# EAGLE board Single Board 12s baru (EAGLE 9.6.2)
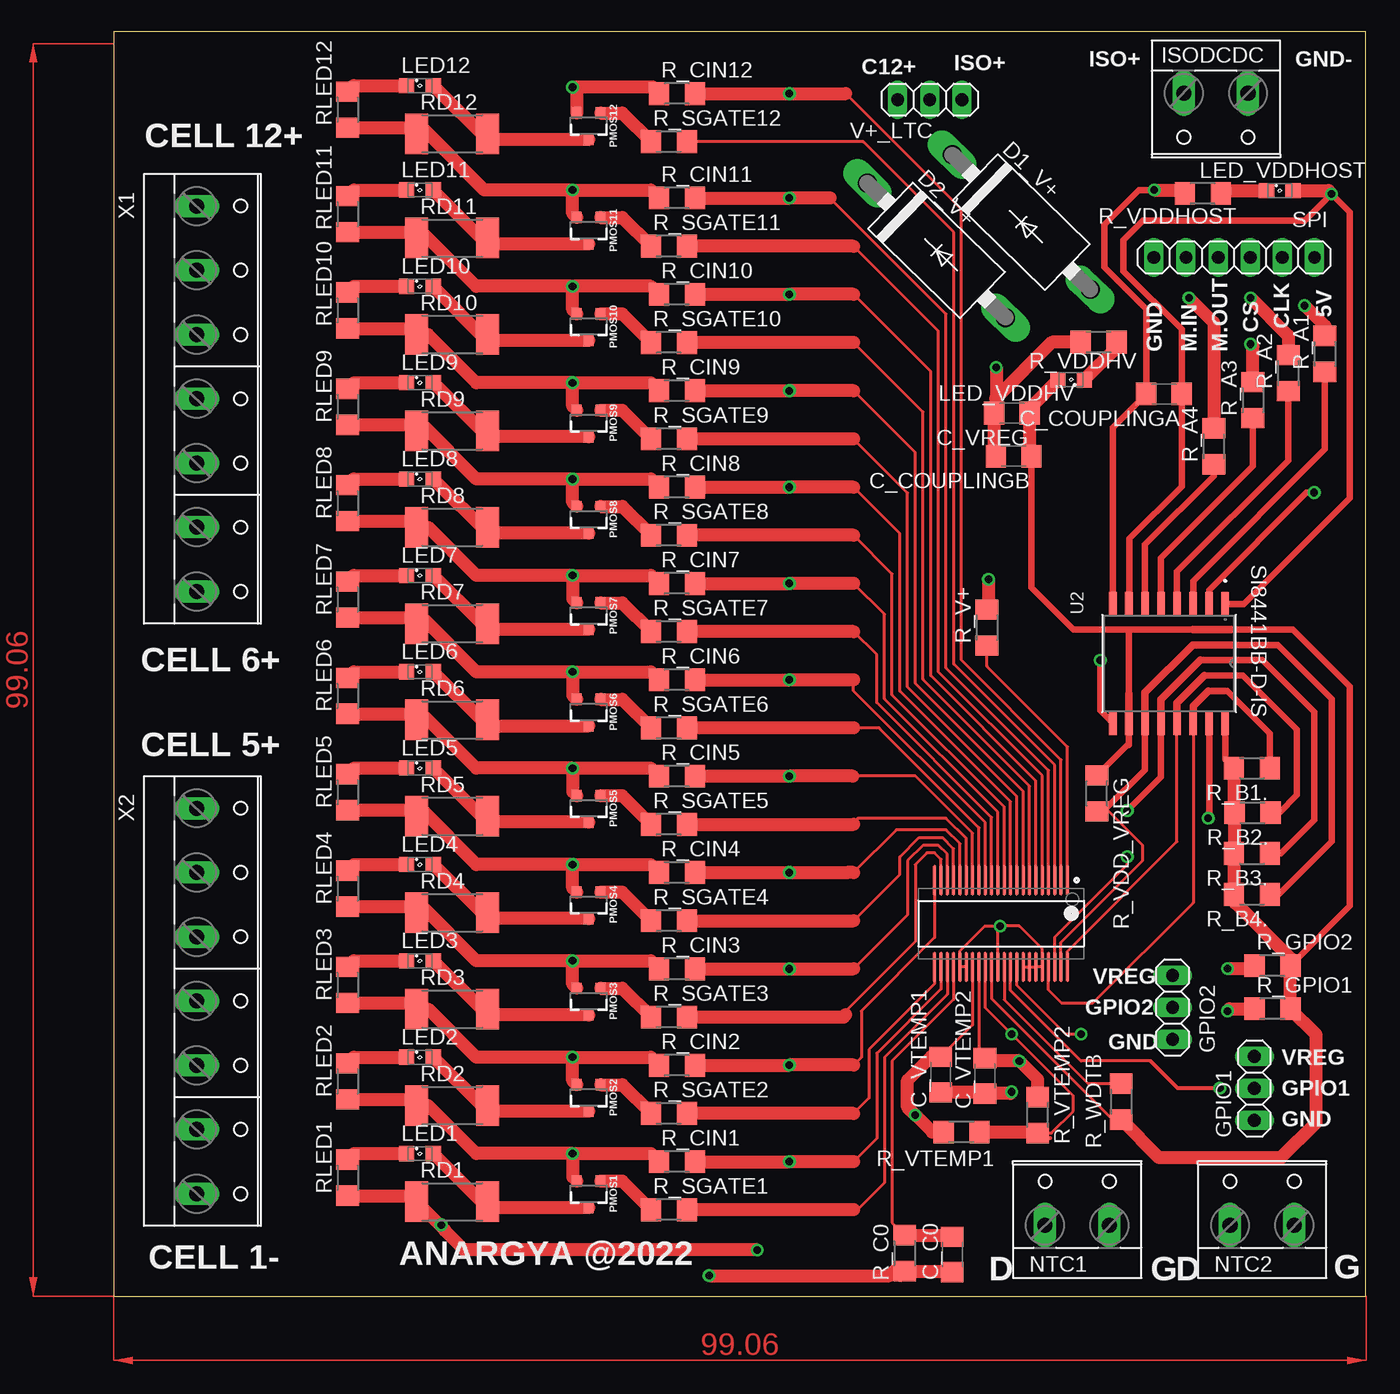
[diagram p0: board, top side]
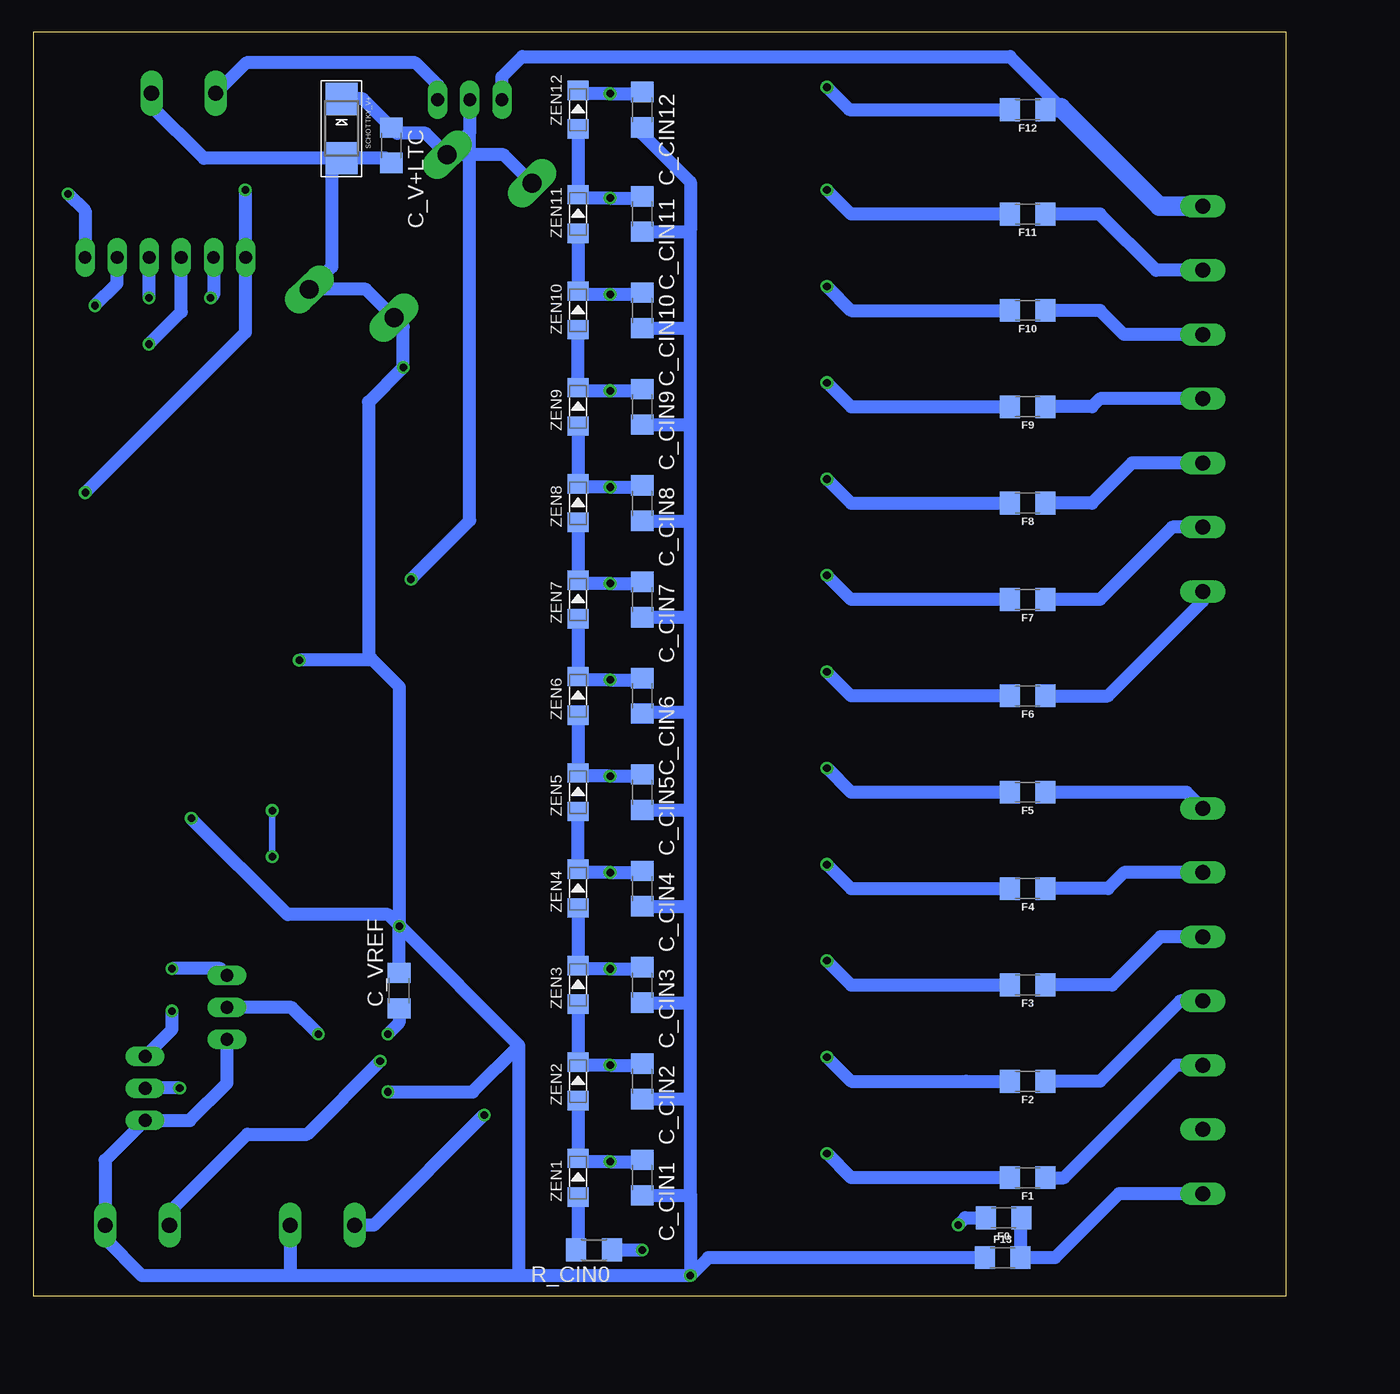
[diagram p1: board, bottom side, seen from below]

Size 99.04 x 100 mm. Coordinates in mm from the lower left corner, seen from the top.
Outline: 0,0 99.04,0 99.04,100 0,100 0,0
Copper layers (1*16): Top 0.035mm / dielectric 1.5mm / Bottom 0.035mm
Design rules "default *": minimum track width 6mil, minimum drill 0.6mm, track to track 6mil, track to pad 6mil, pad to pad 6mil, via to via 6mil, smd to smd 6mil, copper to edge 40mil, drill to drill 6mil, minimum pad ring 10mil, minimum via ring 8mil, stop-mask expansion 4mil, vias tented up to drill 0mil, thermal gap 10mil

## Footprints (pad centres in the part's own frame; a part is rotated, then mirrored left to right if it is on the bottom)
C1206 = smd 1.6 x 1.8: 1 -1.4,0; 2 1.4,0
DO27-15 = drill 1.499 long: A 7.62,0; C -7.62,0
1206 = smd 1.6 x 1.8: 1 -1.4,0; 2 1.4,0
1X03 = drill 1.016 long: 1 -2.54,0; 2 0,0; 3 2.54,0
W237-132 = drill 1.194 long: 1 -2.54,-0.635; 2 2.54,-0.635
SML0805 = smd 1.2 x 1.2: A 1.05,0; C -1.05,0
SOT23-3 = smd 0.8 x 0.9: 1 -0.95,-1; 2 0.95,-1; 3 0,1.1
R1206 = smd 1.6 x 1.803: 1 -1.422,0; 2 1.422,0
R2512 = smd 1.8 x 3.2: 1 -2.8,0; 2 2.8,0
SMADIODE = smd 2.54 x 2.54: A 2.349,0; C -2.349,0
1X06 = drill 1.016 long: 1 -6.35,0; 2 -3.81,0; 3 -1.27,0; 4 1.27,0; 5 3.81,0; 6 6.35,0
SOIC-16W_SIL = smd 1.9 x 0.6: 1 -4.7,4.445; 2 -4.7,3.175; 3 -4.7,1.905; 4 -4.7,0.635; 5 -4.7,-0.635; 6 -4.7,-1.905; 7 -4.7,-3.175; 8 -4.7,-4.445; 9 4.7,-4.445; 10 4.7,-3.175; 11 4.7,-1.905; 12 4.7,-0.635; 13 4.7,0.635; 14 4.7,1.905; 15 4.7,3.175; 16 4.7,4.445
LINEAR_TECHNOLOGY_LTC6803HG-4#PBF_2 = smd 2.45 x 0.25: 1 -3.425,5.25; 2 -3.425,4.75; 3 -3.425,4.25; 4 -3.425,3.75; 5 -3.425,3.25; 6 -3.425,2.75; 7 -3.425,2.25; 8 -3.425,1.75; 9 -3.425,1.25; 10 -3.425,0.75; 11 -3.425,0.25; 12 -3.425,-0.25; 13 -3.425,-0.75; 14 -3.425,-1.25; 15 -3.425,-1.75; 16 -3.425,-2.25; 17 -3.425,-2.75; 18 -3.425,-3.25; 19 -3.425,-3.75; 20 -3.425,-4.25; 21 -3.425,-4.75; 22 -3.425,-5.25; 23 3.425,-5.25; 24 3.425,-4.75; 25 3.425,-4.25; 26 3.425,-3.75; 27 3.425,-3.25; 28 3.425,-2.75; 29 3.425,-2.25; 30 3.425,-1.75; 31 3.425,-1.25; 32 3.425,-0.75; 33 3.425,-0.25; 34 3.425,0.25; 35 3.425,0.75; 36 3.425,1.25; 37 3.425,1.75; 38 3.425,2.25; 39 3.425,2.75; 40 3.425,3.25; 41 3.425,3.75; 42 3.425,4.25; 43 3.425,4.75; 44 3.425,5.25
W237-7P = drill 1.194 long: 1 -15.24,-0.635; 2 -10.16,-0.635; 3 -5.08,-0.635; 4 0,-0.635; 5 5.08,-0.635; 6 10.16,-0.635; 7 15.24,-0.635
LL-34 = smd 1.524 x 1.676: A -1.524,0; C 1.524,0

## Placement (x,y rotation side)
C_C0  100n, 1206  [C1206]  66.32,3.3 270 top
C_CIN1  100n, 1206  [C1206]  50.9,9.37 270 bottom
C_CIN2  100n, 1206  [C1206]  50.9,16.99 270 bottom
C_CIN3  100n, 1206  [C1206]  50.9,24.61 270 bottom
C_CIN4  100n, 1206  [C1206]  50.9,32.23 270 bottom
C_CIN5  100n, 1206  [C1206]  50.9,39.85 270 bottom
C_CIN6  100n, 1206  [C1206]  50.9,47.47 270 bottom
C_CIN7  100n, 1206  [C1206]  50.9,55.09 270 bottom
C_CIN8  100n, 1206  [C1206]  50.9,62.71 270 bottom
C_CIN9  100n, 1206  [C1206]  50.9,70.33 270 bottom
C_CIN10  100n, 1206  [C1206]  50.9,77.95 270 bottom
C_CIN11  100n, 1206  [C1206]  50.9,85.57 270 bottom
C_CIN12  100n, 1206  [C1206]  50.9,93.83 270 bottom
C_COUPLINGA  1u, 1206  [C1206]  83.06,71.35 180 top
C_COUPLINGB  1u, 1206  [C1206]  71.17,66.42 180 top
C_V+LTC  100n, 1206  [C1206]  70.74,91.01 270 bottom
C_VREF  1u, 1206  [C1206]  70.13,24.16 90 bottom
C_VREG  1u, 1206  [C1206]  71.04,69.82 180 top
C_VTEMP1  1u, 1206  [C1206]  65.41,17.53 270 top
C_VTEMP2  1u, 1206  [C1206]  68.91,17.42 270 top
D1_V+  SCHOTTKY BARRIER RECTIFIER  [DO27-15]  71.78,84.94 315.7 top
D2_V+  SCHOTTKY BARRIER RECTIFIER  [DO27-15]  65.07,82.7 315.8 top
F0  500mA, 1206  [1206]  22.33,6.2 180 bottom
F1  500mA, 1206  [1206]  20.42,9.37 180 bottom
F2  500mA, 1206  [1206]  20.42,16.99 180 bottom
F3  500mA, 1206  [1206]  20.42,24.61 180 bottom
F4  500mA, 1206  [1206]  20.42,32.23 180 bottom
F5  500mA, 1206  [1206]  20.42,39.85 180 bottom
F6  500mA, 1206  [1206]  20.42,47.47 180 bottom
F7  500mA, 1206  [1206]  20.42,55.09 180 bottom
F8  500mA, 1206  [1206]  20.42,62.71 180 bottom
F9  500mA, 1206  [1206]  20.42,70.33 180 bottom
F10  500mA, 1206  [1206]  20.42,77.95 180 bottom
F11  500mA, 1206  [1206]  20.42,85.57 180 bottom
F12  500mA, 1206  [1206]  20.42,93.83 180 bottom
F13  500mA, 1206  [1206]  22.4,3.05 0 bottom
GPIO1  [1X03]  90.22,16.43 90 top
GPIO2  [1X03]  83.74,22.83 90 top
ISODCDC  [W237-132]  87.17,94.49 180 top
LED1  0805  [SML0805]  24.23,11.28 0 top
LED2  0805  [SML0805]  24.23,18.9 0 top
LED3  0805  [SML0805]  24.23,26.52 0 top
LED4  0805  [SML0805]  24.23,34.14 0 top
LED5  0805  [SML0805]  24.23,41.76 0 top
LED6  0805  [SML0805]  24.23,49.38 0 top
LED7  0805  [SML0805]  24.23,57 0 top
LED8  0805  [SML0805]  24.23,64.62 0 top
LED9  0805  [SML0805]  24.23,72.24 0 top
LED10  0805  [SML0805]  24.23,79.86 0 top
LED11  0805  [SML0805]  24.23,87.48 0 top
LED12  0805  [SML0805]  24.23,95.73 0 top
LED_VDDHOST  0805  [SML0805]  92.23,87.43 0 top
LED_VDDHV  0805  [SML0805]  75.72,72.47 180 top
NTC1  [W237-132]  76.2,6.25 0 top
NTC2  [W237-132]  90.83,6.25 0 top
PMOS1  SI2301  [SOT23-3]  37.57,8.1 180 top
PMOS2  SI2301  [SOT23-3]  37.57,15.72 180 top
PMOS3  SI2301  [SOT23-3]  37.57,23.34 180 top
PMOS4  SI2301  [SOT23-3]  37.57,30.96 180 top
PMOS5  SI2301  [SOT23-3]  37.57,38.58 180 top
PMOS6  SI2301  [SOT23-3]  37.57,46.2 180 top
PMOS7  SI2301  [SOT23-3]  37.57,53.82 180 top
PMOS8  SI2301  [SOT23-3]  37.57,61.44 180 top
PMOS9  SI2301  [SOT23-3]  37.57,69.06 180 top
PMOS10  SI2301  [SOT23-3]  37.57,76.68 180 top
PMOS11  SI2301  [SOT23-3]  37.57,84.3 180 top
PMOS12  SI2301  [SOT23-3]  37.57,92.56 180 top
R_A1  100R, 1206  [R1206]  95.78,74.52 90 top
R_A2  100R, 1206  [R1206]  92.89,73 90 top
R_A3  100R, 1206  [R1206]  90.09,70.87 90 top
R_A4  100R, 1206  [R1206]  87,67.21 90 top
R_B1.  4k7, 1206  [R1206]  90.02,41.76 180 top
R_B2.  4k7, 1206  [R1206]  90.07,38.23 180 top
R_B3.  4k7, 1206  [R1206]  90.02,35 180 top
R_B4.  4k7, 1206  [R1206]  90.02,31.78 180 top
R_C0  220, 1206  [R1206]  62.56,3.4 90 top
R_CIN0  100, 1206  [R1206]  54.71,3.66 180 bottom
R_CIN1  100, 1206  [R1206]  44.55,10.64 0 top
R_CIN2  100, 1206  [R1206]  44.55,18.26 0 top
R_CIN3  100, 1206  [R1206]  44.55,25.88 0 top
R_CIN4  100, 1206  [R1206]  44.55,33.5 0 top
R_CIN5  100, 1206  [R1206]  44.55,41.12 0 top
R_CIN6  100, 1206  [R1206]  44.55,48.74 0 top
R_CIN7  100, 1206  [R1206]  44.55,56.36 0 top
R_CIN8  100, 1206  [R1206]  44.55,63.98 0 top
R_CIN9  100, 1206  [R1206]  44.55,71.6 0 top
R_CIN10  100, 1206  [R1206]  44.55,79.22 0 top
R_CIN11  100, 1206  [R1206]  44.55,86.84 0 top
R_CIN12  100, 1206  [R1206]  44.55,95.1 0 top
R_GPIO1  220, 1206  [R1206]  91.64,22.73 0 top
R_GPIO2  220, 1206  [R1206]  91.64,26.14 0 top
R_SGATE1  3.3k, 1206  [R1206]  43.92,6.83 0 top
R_SGATE2  3.3k, 1206  [R1206]  43.92,14.45 0 top
R_SGATE3  3.3k, 1206  [R1206]  43.92,22.07 0 top
R_SGATE4  3.3k, 1206  [R1206]  43.92,29.69 0 top
R_SGATE5  3.3k, 1206  [R1206]  43.92,37.31 0 top
R_SGATE6  3.3k, 1206  [R1206]  43.92,44.93 0 top
R_SGATE7  3.3k, 1206  [R1206]  43.92,52.55 0 top
R_SGATE8  3.3k, 1206  [R1206]  43.92,60.17 0 top
R_SGATE9  3.3k, 1206  [R1206]  43.92,67.79 0 top
R_SGATE10  3.3k, 1206  [R1206]  43.92,75.41 0 top
R_SGATE11  3.3k, 1206  [R1206]  43.92,83.03 0 top
R_SGATE12  3.3k, 1206  [R1206]  43.92,91.29 0 top
R_V+  100, 1206  [R1206]  69.06,52.88 90 top
R_VDD_VREG  1k, 1206  [R1206]  77.75,39.75 270 top
R_VDDHOST  470, 1206  [R1206]  86.13,87.2 0 top
R_VDDHV  470, 1206  [R1206]  77.9,75.44 0 top
R_VTEMP1  10K, 1206  [R1206]  67.06,12.98 0 top
R_VTEMP2  10K, 1206  [R1206]  73.08,14.33 270 top
R_WDTB  220, 1206  [R1206]  79.68,15.39 90 top
RD1  47, 2512  [R2512]  26.77,7.47 0 top
RD2  47, 2512  [R2512]  26.77,15.09 0 top
RD3  47, 2512  [R2512]  26.77,22.71 0 top
RD4  47, 2512  [R2512]  26.77,30.33 0 top
RD5  47, 2512  [R2512]  26.77,37.95 0 top
RD6  47, 2512  [R2512]  26.77,45.57 0 top
RD7  47, 2512  [R2512]  26.77,53.19 0 top
RD8  47, 2512  [R2512]  26.77,60.81 0 top
RD9  47, 2512  [R2512]  26.77,68.43 0 top
RD10  47, 2512  [R2512]  26.77,76.05 0 top
RD11  47, 2512  [R2512]  26.77,83.67 0 top
RD12  47, 2512  [R2512]  26.77,91.92 0 top
RLED1  470, 1206  [R1206]  18.52,9.37 90 top
RLED2  470, 1206  [R1206]  18.52,16.99 90 top
RLED3  470, 1206  [R1206]  18.52,24.61 90 top
RLED4  470, 1206  [R1206]  18.52,32.23 90 top
RLED5  470, 1206  [R1206]  18.52,39.85 90 top
RLED6  470, 1206  [R1206]  18.52,47.47 90 top
RLED7  470, 1206  [R1206]  18.52,55.09 90 top
RLED8  470, 1206  [R1206]  18.52,62.71 90 top
RLED9  470, 1206  [R1206]  18.52,70.33 90 top
RLED10  470, 1206  [R1206]  18.52,77.95 90 top
RLED11  470, 1206  [R1206]  18.52,85.57 90 top
RLED12  470, 1206  [R1206]  18.52,93.83 90 top
SCHOTTKY_V+  SS100, 100V, SMA/DO-214AC  [SMADIODE]  74.68,92.33 270 bottom
SPI  [1X06]  88.62,82.14 180 top
U1  SI8441BB-D-IS  [SOIC-16W_SIL]  83.46,50.04 270 top
U2  LINEAR_TECHNOLOGY_LTC6803HG-4#PBFLINEAR_TECHNOLOGY_LTC6803HG-4#PBF_0_2  [LINEAR_TECHNOLOGY_LTC6803HG-4#PBF_2]  70.18,29.46 270 top
V+_LTC  [1X03]  64.54,94.61 0 top
X1  [W237-7P]  7.21,70.97 270 top
X2  [W237-7P]  7.21,23.34 270 top
ZEN1  Zener 5.1V, LL34  [LL-34]  55.98,9.37 90 bottom
ZEN2  Zener 5.1V, LL34  [LL-34]  55.98,16.99 90 bottom
ZEN3  Zener 5.1V, LL34  [LL-34]  55.98,24.61 90 bottom
ZEN4  Zener 5.1V, LL34  [LL-34]  55.98,32.23 90 bottom
ZEN5  Zener 5.1V, LL34  [LL-34]  55.98,39.85 90 bottom
ZEN6  Zener 5.1V, LL34  [LL-34]  55.98,47.47 90 bottom
ZEN7  Zener 5.1V, LL34  [LL-34]  55.98,55.09 90 bottom
ZEN8  Zener 5.1V, LL34  [LL-34]  55.98,62.71 90 bottom
ZEN9  Zener 5.1V, LL34  [LL-34]  55.98,70.33 90 bottom
ZEN10  Zener 5.1V, LL34  [LL-34]  55.98,77.95 90 bottom
ZEN11  Zener 5.1V, LL34  [LL-34]  55.98,85.57 90 bottom
ZEN12  Zener 5.1V, LL34  [LL-34]  55.98,93.83 90 bottom

## Library data of the parts
C_C0 C_CIN1-C_CIN12 C_COUPLINGA C_COUPLINGB C_V+LTC C_VREF C_VREG C_VTEMP1 C_VTEMP2 = rcl; SPICEPREFIX: C
D1_V+ D2_V+ = diode
F0 F1-F13 = SparkFun-Fuses; PROD_ID: RES-08585
GPIO1 GPIO2 SPI V+_LTC = pinhead
ISODCDC NTC1 NTC2 X1 X2 = con-wago-508; OC_FARNELL: unknown; OC_NEWARK: unknown
LED1-LED12 LED_VDDHOST LED_VDDHV = led
PMOS1-PMOS12 = SparkFun-DiscreteSemi; PROD_ID: TRANS-08285
R_A1-R_A4 R_B1. R_B2. R_B3. R_B4. R_C0 R_CIN0 R_CIN1-R_CIN12 R_GPIO1 R_GPIO2 R_SGATE1-R_SGATE12 R_V+ R_VDD_VREG R_VDDHOST R_VDDHV R_VTEMP1 R_VTEMP2 R_WDTB RD1-RD12 RLED1-RLED12 = rcl; SPICEPREFIX: R
SCHOTTKY_V+ = adafruit
U1 = SI8441BB; COPYRIGHT: Copyright (C) 2021 Ultra Librarian. All rights reserved.; DIGI-KEY_PART_NUMBER_1: 336-1762-5-ND; MANUFACTURER_PART_NUMBER: SI8441BB-D-IS; MFR_NAME: Silicon Labs
U2 = Linear Technology - LTC6803HG-4#PBF; BATTERY_CHEMISTRY: Li-Ion, Supercapacitors, Multi-Chemistry; CIIVA_IDS: 1416646; COMPONENT_LINK_1_DESCRIPTION: Manufacturer URL; COMPONENT_LINK_1_URL: http://www.linear.com/; COMPONENT_LINK_3_DESCRIPTION: Package Specification; COMPONENT_LINK_3_URL: http://cds.linear.com/docs/en/packaging/SSOP_44_05-08-1754.pdf; DATASHEET: http://cds.linear.com/docs/en/datasheet/680324fa.pdf; DATASHEET_VERSION: Rev. A; FOOTPRINT_VARIANT_NAME_0: Level C; FOOTPRINT_VARIANT_NAME_1: Level B; FOOTPRINT_VARIANT_NAME_2: Level A; IMPORTED: yes; IMPORTED_FROM: vault; IMPORT_TS: 1521854382; MF: Linear Technology; MOUNTING_TECHNOLOGY: Surface Mount; MPN: LTC6803HG-4#PBF; NUMBER_OF_CELLS: > 1000 V of stacked Li-Ion cells; PACKAGE: G-44; PACKAGE_DESCRIPTION: 44-Pin Plastic SSOP, Body 12.8 x 5.3 mm, Pitch 0.5 mm; PACKAGE_VERSION: Rev. Ã ̃, 06/2010; PIN_0_0_40_INSIDE_EDGE: clock; PREFIX: U; RELEASE_DATE: 1377764895; ROHS: Yes; TYPE_OF_CHARGER: Battery Stack Monitor; VAULT_GUID: BA7F31F3-B2E0-4312-B550-1E6C11B00551; VAULT_REVISION: 890CB210-B5D1-4A20-8471-0AD6F7E52161; VIN_MAXV: 60
ZEN1-ZEN12 = Zener SMD LL-34; MPN: LL4148ST

## Nets
0V: C_C0.2 C_CIN1.2 C_CIN2.2 C_CIN3.2 C_CIN4.2 C_CIN5.2 C_CIN6.2 C_CIN7.2 C_CIN8.2 C_CIN9.2 C_CIN10.2 C_CIN11.2 C_CIN12.2 C_COUPLINGB.2 C_V+LTC.2 C_VREF.2 C_VREG.2 C_VTEMP1.2 C_VTEMP2.2 D1_V+.A D2_V+.A F13.1 GPIO1.1 GPIO2.1 ISODCDC.1 NTC1.2 NTC2.2 R_C0.1 R_VDDHV.1 SCHOTTKY_V+.A U1.9 U1.15 U2.27 U2.28 U2.33 U2.37 U2.38 U2.39 U2.40
5V_HOST: C_COUPLINGA.1 LED_VDDHOST.A SPI.1 U1.1 U1.7
C0: R_CIN0.2 ZEN1.A
C1: C_CIN1.1 R_CIN1.2 U2.24 ZEN1.C ZEN2.A
C2: C_CIN2.1 R_CIN2.2 U2.22 ZEN2.C ZEN3.A
C3: C_CIN3.1 R_CIN3.2 U2.20 ZEN3.C ZEN4.A
C4: C_CIN4.1 R_CIN4.2 U2.18 ZEN4.C ZEN5.A
C5: C_CIN5.1 R_CIN5.2 U2.16 ZEN5.C ZEN6.A
C6: C_CIN6.1 R_CIN6.2 U2.14 ZEN6.C ZEN7.A
C7: C_CIN7.1 R_CIN7.2 U2.12 ZEN7.C ZEN8.A
C8: C_CIN8.1 R_CIN8.2 U2.10 ZEN8.C ZEN9.A
C9: C_CIN9.1 R_CIN9.2 U2.8 ZEN9.C ZEN10.A
C10: C_CIN10.1 R_CIN10.2 U2.6 ZEN10.C ZEN11.A
C11: C_CIN11.1 R_CIN11.2 U2.4 ZEN11.C ZEN12.A
C12: C_CIN12.1 R_CIN12.2 U2.2 ZEN12.C
CELL1+: F1.1 X2.5
CELL1-: F0.1 F13.2 X2.7
CELL2+: F2.1 X2.4
CELL3+: F3.1 X2.3
CELL4+: F4.1 X2.2
CELL5+: F5.1 X2.1
CELL6+: F6.1 X1.7
CELL7+: F7.1 X1.6
CELL8+: F8.1 X1.5
CELL9+: F9.1 X1.4
CELL10+: F10.1 X1.3
CELL11+: F11.1 X1.2
CELL12+: F12.1 V+_LTC.1 X1.1
GND_HOST: C_COUPLINGA.2 R_VDDHOST.1 SPI.6 U1.2 U1.8
N$1: R_V+.1 U2.1
N$2: PMOS1.1 R_SGATE1.1
N$3: LED1.A PMOS1.3 RD1.2
N$4: R_A2.1 U1.4
N$5: LED_VDDHOST.C R_VDDHOST.2
N$6: LED1.C RLED1.2
N$7: F0.2 R_CIN0.1 RD1.1 RLED1.1
N$8: R_WDTB.2 U2.34
N$9: ISODCDC.2 V+_LTC.3
N$10: LED_VDDHV.C R_VDDHV.2
N$12: PMOS2.1 R_SGATE2.1
N$15: R_B4..1 R_VDD_VREG.2 U1.11 U2.43
N$16: LED2.A PMOS2.3 RD2.2
N$17: LED2.C RLED2.2
N$18: F1.2 PMOS1.2 R_CIN1.1 RD2.1 RLED2.1
N$19: R_B3..1 U1.12 U2.42
N$20: R_B2..1 U1.13 U2.44
N$21: PMOS3.1 R_SGATE3.1
N$22: R_B1..1 U1.14 U2.41
N$23: R_A3.1 U1.5
N$24: R_A1.1 U1.3
N$25: LED3.A PMOS3.3 RD3.2
N$26: LED3.C RLED3.2
N$27: F2.2 PMOS2.2 R_CIN2.1 RD3.1 RLED3.1
N$28: R_A4.1 U1.6
N$29: C_C0.1 R_C0.2 U2.26
N$30: PMOS4.1 R_SGATE4.1
N$31: GPIO2.2 U2.36
N$32: GPIO1.2 U2.35
N$33: C_VTEMP2.1 NTC2.1 R_VTEMP2.1 U2.30
N$34: LED4.A PMOS4.3 RD4.2
N$35: LED4.C RLED4.2
N$36: F3.2 PMOS3.2 R_CIN3.1 RD4.1 RLED4.1
N$37: C_VTEMP1.1 NTC1.1 R_VTEMP1.1 U2.29
N$38: GPIO2.3 R_GPIO2.1
N$39: PMOS5.1 R_SGATE5.1
N$40: GPIO1.3 R_GPIO1.1
N$43: LED5.A PMOS5.3 RD5.2
N$44: LED5.C RLED5.2
N$45: F4.2 PMOS4.2 R_CIN4.1 RD5.1 RLED5.1
N$48: PMOS6.1 R_SGATE6.1
N$51: X2.6
N$52: LED6.A PMOS6.3 RD6.2
N$53: LED6.C RLED6.2
N$54: F5.2 PMOS5.2 R_CIN5.1 RD6.1 RLED6.1
N$57: PMOS7.1 R_SGATE7.1
N$61: LED7.A PMOS7.3 RD7.2
N$62: LED7.C RLED7.2
N$63: F6.2 PMOS6.2 R_CIN6.1 RD7.1 RLED7.1
N$66: PMOS8.1 R_SGATE8.1
N$70: LED8.A PMOS8.3 RD8.2
N$71: LED8.C RLED8.2
N$72: F7.2 PMOS7.2 R_CIN7.1 RD8.1 RLED8.1
N$75: PMOS9.1 R_SGATE9.1
N$79: LED9.A PMOS9.3 RD9.2
N$80: LED9.C RLED9.2
N$81: F8.2 PMOS8.2 R_CIN8.1 RD9.1 RLED9.1
N$84: PMOS10.1 R_SGATE10.1
N$88: LED10.A PMOS10.3 RD10.2
N$89: LED10.C RLED10.2
N$90: F9.2 PMOS9.2 R_CIN9.1 RD10.1 RLED10.1
N$93: PMOS11.1 R_SGATE11.1
N$97: LED11.A PMOS11.3 RD11.2
N$98: LED11.C RLED11.2
N$99: F10.2 PMOS10.2 R_CIN10.1 RD11.1 RLED11.1
N$102: PMOS12.1 R_SGATE12.1
N$105: F12.2 PMOS12.2 R_CIN12.1
N$106: LED12.A PMOS12.3 RD12.2
N$107: LED12.C RLED12.2
N$108: F11.2 PMOS11.2 R_CIN11.1 RD12.1 RLED12.1
S1: R_SGATE1.2 U2.25
S2: R_SGATE2.2 U2.23
S3: R_SGATE3.2 U2.21
S4: R_SGATE4.2 U2.19
S5: R_SGATE5.2 U2.17
S6: R_SGATE6.2 U2.15
S7: R_SGATE7.2 U2.13
S8: R_SGATE8.2 U2.11
S9: R_SGATE9.2 U2.9
S10: R_SGATE10.2 U2.7
S11: R_SGATE11.2 U2.5
S12: R_SGATE12.2 U2.3
SPI_CHIPSELECT: R_A2.2 SPI.3
SPI_CLOCK: R_A1.2 SPI.2
SPI_MASTERIN: R_A4.2 SPI.5
SPI_MASTEROUT: R_A3.2 SPI.4
V+_LTC: C_V+LTC.1 D1_V+.C D2_V+.C R_V+.2 SCHOTTKY_V+.C V+_LTC.2
VREF: C_VREF.1 R_VTEMP1.2 R_VTEMP2.2 U2.31
VREG: C_COUPLINGB.1 C_VREG.1 LED_VDDHV.A R_B1..2 R_B2..2 R_B3..2 R_B4..2 R_GPIO1.2 R_GPIO2.2 R_VDD_VREG.1 R_WDTB.1 U1.10 U1.16 U2.32

## Tracks (layer width: path | path; a pad name or v marks a point on that pad's centre or on a via)
0V  (via drill 0.6)
  Top 0.152: 73.46,26.07 U2.40
  Top 0.254: U2.28 U2.27 66.93,27.31 68.89,29.26 v70.1,29.26 | U2.33 69.93,29.09 v70.1,29.26 | v70.1,29.26 71.63,29.26 73.43,27.46 U2.40 U2.39 U2.38 U2.37
  Top 0.305: C_VTEMP2.2 69.04,16.15 | 69.77,69.7 C_VREG.2
  Top 0.508: v78.03,50.29 78.03,46.33 U1.9 | U1.15 86.64,37.87 v86.56,37.8
  Top 1.016: C_VTEMP1.2 68.81,16.13 C_VTEMP2.2 70.89,16.02 v71.02,16.15 | 62.2,1.63 R_C0.1 | R_C0.1 66.24,1.98 C_C0.2 | v47.09,1.63 61.37,1.63 61.72,1.98 R_C0.1 | R_VDDHV.1 74.22,75.44 69.77,70.99 69.77,69.7 | C_COUPLINGB.2 69.64,66.55 69.64,69.49 | 69.64,69.49 C_VREG.2 | v69.8,73.46 69.8,69.65 69.64,69.49
  Bottom 0.508: C_VREF.2 70.18,25.61
  Bottom 1.016: C_CIN12.2 50.9,91.92 47.09,88.11 47.09,84.3 | C_CIN11.2 47.22,84.17 47.09,84.3 | C_CIN10.2 47.22,76.55 47.09,76.68 | 47.09,76.68 47.09,84.3 | C_CIN9.2 47.22,68.93 47.09,69.06 | 47.09,69.06 47.09,76.68 | C_CIN8.2 47.22,61.31 47.09,61.44 | 47.09,61.44 47.09,69.06 | C_CIN7.2 47.22,53.69 47.09,53.82 | 47.09,53.82 47.09,61.44 | C_CIN6.2 50.77,46.2 47.09,46.2 | 47.09,46.2 47.09,53.82 | C_CIN5.2 47.22,38.45 47.09,38.58 | 47.09,38.58 47.09,46.2 | C_CIN4.2 47.22,30.83 47.09,30.96 | 47.09,30.96 47.09,38.58 | C_CIN3.2 47.22,23.21 47.09,23.34 | 47.09,23.34 47.09,30.96 | C_CIN2.2 47.22,15.59 47.09,15.72 | 47.09,15.72 47.09,23.34 | C_CIN1.2 47.22,7.97 47.09,8.1 | 47.09,8.1 47.09,15.72 | 47.09,8.1 v47.09,1.63 | v47.09,1.63 45.67,3.05 F13.1 | 75.44,89.98 SCHOTTKY_V+.A 71.11,89.98 C_V+LTC.2 | 75.44,89.98 75.44,81.41 D1_V+.A 72.76,79.62 D2_V+.A 69.8,76.65 v69.8,73.46 72.54,70.71 72.54,50.6 72.24,50.29 | v47.09,1.63 60.66,1.63 | 60.66,1.63 60.66,19.81 | 60.66,19.81 v70.1,29.26 | 60.66,1.63 78.64,1.63 | 78.64,1.63 90.47,1.63 93.37,4.52 NTC2.2 93.37,10.74 GPIO1.1 86.69,13.89 83.74,16.84 GPIO2.1 | v70.1,29.26 71.02,30.18 78.94,30.18 v86.56,37.8 | v70.1,29.26 70.1,30.18 | 70.1,30.18 70.1,48.16 72.24,50.29 | 72.24,50.29 v78.03,50.29 | C_VREF.2 70.13,30.15 70.1,30.18 | 60.66,19.81 64.31,16.15 v71.02,16.15 | NTC1.2 78.74,1.73 78.64,1.63 | ISODCDC.1 89.76,95.07 89.76,94.18 85.56,89.98 75.44,89.98
5V_HOST  (via drill 0.6)
  Top 0.305: C_COUPLINGA.1 84.46,71.6
  Top 0.508: U1.7 80.33,54.78 80.33,59.91 84.46,64.04 C_COUPLINGA.1 84.46,76.48 79.86,81.08 79.86,83.52 81.38,85.04 94.18,85.04 v96.32,87.17 | U1.1 89.38,54.74 97.77,63.13 97.77,85.72 96.06,87.43
  Top 1.016: LED_VDDHOST.A 96.06,87.43 v96.32,87.17
  Bottom 1.016: v96.32,87.17 94.97,85.83 SPI.1
C0
  Bottom 1.016: ZEN1.A 55.98,3.81 R_CIN0.2
C1  (via drill 0.6)
  Top 0.254: U2.24 65.43,24.28 60.35,19.2 60.35,12.47 58.52,10.64
  Top 1.016: R_CIN1.2 v53.44,10.64 58.52,10.64
  Bottom 1.016: ZEN2.A ZEN1.C 55.98,10.64 v53.44,10.64 51.03,10.64 C_CIN1.1
C2  (via drill 0.6)
  Top 0.254: U2.22 64.93,28.35 59.13,22.55 59.13,18.9 58.52,18.29
  Top 1.016: R_CIN2.2 v53.44,18.26 53.47,18.29 58.52,18.29
  Bottom 1.016: ZEN3.A ZEN2.C 55.73,18.26 v53.44,18.26 51.03,18.26 C_CIN2.1
C3  (via drill 0.6)
  Top 0.254: U2.20 65.93,34.96 65.23,35.66 64.01,35.66 62.79,34.44 62.79,30.15 58.52,25.88
  Top 1.016: R_CIN3.2 v53.44,25.88 58.52,25.88
  Bottom 1.016: ZEN4.A ZEN3.C 55.73,25.88 v53.44,25.88 51.03,25.88 C_CIN3.1
C4  (via drill 0.6)
  Top 0.254: U2.18 66.93,35.79 65.84,36.88 61.9,36.88 58.52,33.5
  Top 0.305: 58.62,33.63 58.14,33.63 58.01,33.5
  Top 1.016: R_CIN4.2 v53.44,33.5 58.01,33.5 58.52,33.5
  Bottom 1.016: ZEN5.A ZEN4.C 55.98,33.5 v53.44,33.5 51.03,33.5 C_CIN4.1
C5  (via drill 0.6)
  Top 0.254: U2.16 67.93,36.62 63.42,41.12 58.45,41.12
  Top 1.016: R_CIN5.2 v53.44,41.12 58.45,41.12
  Bottom 1.016: ZEN6.A ZEN5.C 55.73,41.12 v53.44,41.12 51.03,41.12 C_CIN5.1
C6  (via drill 0.6)
  Top 0.254: 58.52,48.74 58.52,47.85 68.93,37.45 U2.14
  Top 1.016: R_CIN6.2 v53.44,48.74 58.52,48.74
  Bottom 1.016: C_CIN6.1 51.03,48.74 v53.44,48.74 55.73,48.74 ZEN6.C ZEN7.A
C7  (via drill 0.6)
  Top 0.254: U2.12 69.93,38.27 60.96,47.24 60.96,53.92 58.52,56.36
  Top 1.016: R_CIN7.2 v53.44,56.36 58.52,56.36
  Bottom 1.016: ZEN8.A ZEN7.C 55.73,56.36 v53.44,56.36 51.03,56.36 C_CIN7.1
C8  (via drill 0.6)
  Top 0.254: U2.10 70.93,39.1 62.18,47.85 62.18,60.33 58.52,63.98
  Top 1.016: R_CIN8.2 v53.44,63.98 58.52,63.98
  Bottom 1.016: C_CIN8.1 51.03,63.98 v53.44,63.98 55.73,63.98 ZEN8.C ZEN9.A
C9  (via drill 0.6)
  Top 0.254: U2.8 71.93,39.93 63.4,48.46 63.4,66.73 58.52,71.6
  Top 1.016: R_CIN9.2 v53.44,71.6 58.52,71.6
  Bottom 1.016: ZEN10.A ZEN9.C 55.73,71.6 v53.44,71.6 51.03,71.6 C_CIN9.1
C10  (via drill 0.6)
  Top 0.254: U2.6 72.93,40.76 64.62,49.07 64.62,73.13 58.52,79.22
  Top 1.016: R_CIN10.2 v53.44,79.22 58.52,79.22
  Bottom 1.016: C_CIN10.1 51.03,79.22 v53.44,79.22 55.73,79.22 ZEN10.C ZEN11.A
C11  (via drill 0.6)
  Top 0.254: U2.4 73.93,41.59 65.84,49.68 65.84,77.67 56.67,86.84
  Top 1.016: R_CIN11.2 v53.44,86.84 56.67,86.84
  Bottom 1.016: 50.77,86.84 C_CIN11.1 51.03,86.84 v53.44,86.84 55.73,86.84 ZEN11.C | ZEN11.C 55.86,86.97 | ZEN11.C 56.24,86.84 | ZEN12.A ZEN11.C
C12  (via drill 0.6)
  Top 0.254: U2.2 74.93,42.42 67.06,50.29 67.06,85.95 57.91,95.1
  Top 1.016: 46.1,95.23 R_CIN12.2 v53.44,95.1 57.91,95.1
  Bottom 1.016: C_CIN12.1 51.03,95.1 v53.44,95.1 55.73,95.1 ZEN12.C
CELL1+
  Bottom 1.016: F1.1 17.55,9.37 8.64,18.29 6.6,18.29 X2.5
CELL1-
  Bottom 1.016: F0.1 21,6.12 F13.2 18.26,3.05 13.21,8.1 X2.7
CELL2+
  Bottom 1.016: F2.1 14.71,16.99 8.36,23.34 X2.4
CELL3+
  Bottom 1.016: F3.1 13.74,24.61 9.93,28.42 X2.3
CELL4+
  Bottom 1.016: F4.1 14.07,32.23 12.8,33.5 X2.2
CELL5+
  Bottom 1.016: X2.1 7.85,39.85 F5.1
CELL6+
  Bottom 1.016: F6.1 14.07,47.47 6.58,54.97 X1.7
CELL7+
  Bottom 1.016: F7.1 14.71,55.09 8.99,60.81 X1.6
CELL8+
  Bottom 1.016: F8.1 15.34,62.71 12.17,65.89 X1.5
CELL9+
  Bottom 1.016: F9.1 15.34,70.33 14.71,70.97 X1.4
CELL10+
  Bottom 1.016: F10.1 14.71,77.95 12.8,76.05 X1.3
CELL11+
  Bottom 1.016: F11.1 14.71,85.57 10.26,81.13 X1.2
CELL12+
  Bottom 1.016: 17.78,93.98 21.82,98.02 60.4,98.02 62,96.42 V+_LTC.1
  Bottom 1.524: X1.1 10.01,86.21 17.78,93.98 18.87,93.98 F12.1
GND_HOST  (via drill 0.6)
  Top 0.305: R_VDDHOST.1 84.58,87.33 | 81.05,71.96 C_COUPLINGA.2 81.69,71.35 82.3,71.35
  Top 0.508: C_COUPLINGA.2 81.66,78.06 78.33,81.38 78.33,84.73 81.08,87.48 v82.3,87.48 | U1.2 86.64,55.85 94.34,63.55 v94.94,63.55 | U1.8 79.02,68.68 81.69,71.35
  Top 1.016: v82.3,87.48 84.43,87.48 84.58,87.33
  Bottom 1.016: v82.3,87.48 82.3,82.17 SPI.6 82.3,82.12 82.3,76.2 v94.94,63.55
N$1
  Top 0.254: U2.1 75.43,43.44 69.06,49.81 R_V+.1
N$2
  Top 1.016: PMOS1.1 40.23,9.1 R_SGATE1.1
N$3
  Top 1.016: LED1.A 29.09,7.47 RD1.2 30.04,7 PMOS1.3
N$4
  Top 0.508: R_A2.1 92.89,66.09 84.1,57.3 U1.4
N$5
  Top 1.016: R_VDDHOST.2 87.78,87.43 LED_VDDHOST.C
N$6
  Top 1.016: RLED1.2 19,11.28 LED1.C
N$7  (via drill 0.6)
  Top 1.016: RLED1.1 23.49,7.95 RD1.1 25.91,5.53 | 25.91,5.53 v25.91,5.64 | v50.9,3.66 27.74,3.66 26.21,5.18 26.21,5.23 25.91,5.53
  Bottom 1.016: R_CIN0.1 v50.9,3.66 | v25.91,5.64 25.35,6.2 F0.2
N$8
  Top 0.254: U2.34 70.43,23.45 77.06,16.81 R_WDTB.2
N$9
  Bottom 1.016: V+_LTC.3 67.08,95.78 68.83,97.54 82.22,97.54 ISODCDC.2
N$10
  Top 1.016: LED_VDDHV.C 79.32,75.02 R_VDDHV.2
N$12
  Top 1.016: PMOS2.1 40.23,16.72 R_SGATE2.1
N$15
  Top 0.254: U2.43 74.93,27.99 81.38,34.44 81.38,35.66 78.49,38.56
  Top 0.305: 81.61,45.39 U1.11
  Top 0.508: 77.75,38.43 R_VDD_VREG.2 78.26,38.33 78.49,38.56 81.56,41.63 U1.11 | 88.7,51.51 92.05,51.51 96.32,47.24 96.32,35.97 91.75,31.39 91.44,31.7 R_B4..1
  Top 0.61: U1.11 81.56,47.73 85.34,51.51 88.7,51.51
N$16
  Top 1.016: LED2.A 29.09,15.09 | 29.09,15.09 RD2.2 | PMOS2.3 29.56,14.62 29.09,15.09
N$17
  Top 1.016: RLED2.2 19,18.9 LED2.C
N$18  (via drill 0.6)
  Top 1.016: v36.3,11.28 36.3,9.42 PMOS1.2 | v36.3,11.28 42.49,11.28 R_CIN1.1 | RLED2.1 23.49,15.57 RD2.1 24.87,15.09 28.68,11.28 v36.3,11.28
  Bottom 1.016: F1.2 34.39,9.37 v36.3,11.28
N$19  (via drill 0.6)
  Top 0.254: U2.42 74.43,28.41 80.16,34.14 v80.16,34.75
  Top 0.508: 85.95,50.29 90.83,50.29 94.94,46.18 94.94,37.64 92.3,35 R_B3..1 | U1.12 82.83,41.07 v80.16,38.41
  Top 0.61: U1.12 82.83,47.17 85.95,50.29
  Bottom 0.508: v80.16,38.41 v80.16,34.75
N$20
  Top 0.254: U2.44 75.43,27.27 84.1,35.94 U1.13
  Top 0.508: R_B2..1 92.18,38.23 93.57,39.62 93.57,44.81 89.31,49.07 86.26,49.07
  Top 0.61: U1.13 84.1,46.91 86.26,49.07
N$21
  Top 1.016: PMOS3.1 40.23,24.34 R_SGATE3.1
N$22
  Top 0.254: U2.41 73.93,24.21 74.98,23.16 77.42,23.16 85.37,31.11 U1.14
  Top 0.508: 86.56,47.85 88.09,47.85 91.44,44.5 R_B1..1
  Top 0.61: U1.14 85.37,46.66 86.56,47.85
N$23
  Top 0.508: R_A3.1 90.09,65.63 82.83,58.37 U1.5
N$24
  Top 0.508: U1.3 85.37,56.57 95.78,66.98 R_A1.1
N$25
  Top 1.016: LED3.A 29.09,22.71 RD3.2 29.25,23.02 28.99,23.02 29.95,22.07 30.12,22.24 PMOS3.3
N$26
  Top 1.016: RLED3.2 19,26.52 LED3.C
N$27  (via drill 0.6)
  Top 1.016: PMOS2.2 36.3,17.04 v36.3,18.9 | v36.3,18.9 42.49,18.9 R_CIN2.1 | v36.3,18.9 28.68,18.9 24.87,22.71 RD3.1 23.49,23.19 RLED3.1
  Bottom 1.016: v36.3,18.9 34.39,16.99 25.3,16.99 F2.2
N$28
  Top 0.508: U1.6 81.56,59.44 87,64.87 R_A4.1
N$29
  Top 0.152: 66.3,4.73 C_C0.1
  Top 0.254: U2.26 66.43,23.45 61.57,18.59 61.57,5.82 R_C0.2
  Top 1.016: R_C0.2 66.2,4.83 66.3,4.73
N$30
  Top 1.016: PMOS4.1 40.23,31.96 R_SGATE4.1
N$31  (via drill 0.6)
  Top 0.254: v76.5,20.73 75.29,20.73 71.43,24.58 U2.36
  Bottom 1.016: v76.5,20.73 78.61,22.84 GPIO2.2
N$32  (via drill 0.6)
  Top 0.254: 81.99,18.59 76.5,18.59 70.93,24.17 U2.35
  Top 0.305: 81.99,18.59 84.12,16.46 v87.48,16.46
  Bottom 1.016: v87.48,16.46 90.19,16.46 GPIO1.2
N$33  (via drill 0.6)
  Top 0.254: U2.30 68.43,19.3
  Top 0.305: 68.43,19.3 C_VTEMP2.1
  Top 1.016: C_VTEMP2.1 69.14,18.59 v71.63,18.59 73.08,17.14 R_VTEMP2.1
  Bottom 1.016: v71.63,18.59 77.42,12.8 82.14,12.8 88.29,6.66 NTC2.1
N$34
  Top 1.016: LED4.A 29.09,30.33 | 29.09,30.33 RD4.2 | PMOS4.3 29.56,29.86 29.09,30.33
N$35
  Top 1.016: RLED4.2 19,34.14 LED4.C
N$36  (via drill 0.6)
  Top 1.016: RLED4.1 23.49,30.81 | 23.49,30.81 RD4.1 | PMOS3.2 36.3,24.66 v36.3,26.52 | v36.3,26.52 42.49,26.52 R_CIN3.1 | v36.3,26.52 28.68,26.52 24.38,30.81 23.49,30.81
  Bottom 1.016: v36.3,26.52 34.39,24.61 F3.2
N$37  (via drill 0.6)
  Top 0.152: R_VTEMP1.1 65.58,12.93
  Top 0.254: U2.29 67.93,21.45 C_VTEMP1.1
  Top 0.305: R_VTEMP1.1 65.3,13.31
  Top 1.016: 64.92,19.2 65.13,19.2 C_VTEMP1.1 64.65,18.93 62.79,17.07 62.79,14.94 v63.4,14.33 64.75,12.98 R_VTEMP1.1
  Bottom 1.016: v63.4,14.33 72.11,5.61 NTC1.1
N$38  (via drill 0.6)
  Top 1.016: v88.09,25.91 89.99,25.91 R_GPIO2.1
  Bottom 1.016: GPIO2.3 84.28,25.91 v88.09,25.91
N$39
  Top 1.016: PMOS5.1 40.23,39.58 R_SGATE5.1
N$40  (via drill 0.6)
  Top 1.016: v88.09,22.55 88.27,22.73 R_GPIO1.1
  Bottom 0.305: 90.45,18.97 GPIO1.3
  Bottom 1.016: GPIO1.3 88.09,21.11 v88.09,22.55
N$43
  Top 1.016: LED5.A 29.09,37.95 | 29.09,37.95 RD5.2 | PMOS5.3 29.56,37.48 29.09,37.95
N$44
  Top 1.016: RLED5.2 19,41.76 LED5.C
N$45  (via drill 0.6)
  Top 1.016: RLED5.1 23.49,38.43 | 23.49,38.43 RD5.1 | PMOS4.2 36.3,32.28 v36.3,34.14 | v36.3,34.14 42.49,34.14 R_CIN4.1 | v36.3,34.14 28.68,34.14 24.38,38.43 23.49,38.43
  Bottom 1.016: v36.3,34.14 34.39,32.23 F4.2
N$48
  Top 1.016: PMOS6.1 40.23,47.2 R_SGATE6.1
N$52
  Top 1.016: LED6.A 29.09,45.57 RD6.2 30.04,45.1 PMOS6.3
N$53
  Top 1.016: RLED6.2 19,49.38 LED6.C
N$54  (via drill 0.6)
  Top 1.016: RLED6.1 23.49,46.05 | 23.49,46.05 RD6.1 | v36.3,41.76 36.3,39.9 PMOS5.2 | v36.3,41.76 42.49,41.76 R_CIN5.1 | v36.3,41.76 28.68,41.76 24.38,46.05 23.49,46.05
  Bottom 1.016: F5.2 34.39,39.85 v36.3,41.76
N$57
  Top 1.016: PMOS7.1 40.23,54.82 R_SGATE7.1
N$61
  Top 1.016: LED7.A 29.09,53.19 RD7.2 30.04,52.72 PMOS7.3
N$62
  Top 1.016: RLED7.2 19,57 LED7.C
N$63  (via drill 0.6)
  Top 1.016: RLED7.1 23.49,53.67 | 23.49,53.67 RD7.1 | v36.3,49.38 36.3,47.52 PMOS6.2 | v36.3,49.38 42.49,49.38 R_CIN6.1 | v36.3,49.38 28.68,49.38 24.38,53.67 23.49,53.67
  Bottom 1.016: F6.2 34.39,47.47 v36.3,49.38
N$66
  Top 1.016: PMOS8.1 40.23,62.44 R_SGATE8.1
N$70
  Top 1.016: LED8.A 29.73,60.17 29.95,60.17 29.95,60.43 | 29.95,60.43 RD8.2 | PMOS8.3 30.04,60.34 29.95,60.43
N$71
  Top 1.016: RLED8.2 19,64.62 LED8.C
N$72  (via drill 0.6)
  Top 1.016: RLED8.1 23.49,61.29 RD8.1 24.87,60.81 28.68,57 v36.3,57 | v36.3,57 36.3,55.14 PMOS7.2 | v36.3,57 42.49,57 R_CIN7.1
  Bottom 1.016: F7.2 34.39,55.09 v36.3,57
N$75
  Top 1.016: PMOS9.1 40.23,70.06 R_SGATE9.1
N$79
  Top 1.016: PMOS9.3 29.48,67.96 | 29.48,67.96 29.31,67.79 29.31,68.17 RD9.2 | LED9.A 29.48,68.04 29.48,67.96
N$80
  Top 1.016: RLED9.2 19,72.24 LED9.C
N$81  (via drill 0.6)
  Top 1.016: RLED9.1 23.49,68.91 | 23.49,68.91 RD9.1 | PMOS8.2 36.3,62.76 v36.3,64.62 | v36.3,64.62 42.49,64.62 R_CIN8.1 | v36.3,64.62 28.68,64.62 24.38,68.91 23.49,68.91
  Bottom 1.016: v36.3,64.62 34.39,62.71 F8.2
N$84
  Top 1.016: PMOS10.1 40.23,77.68 R_SGATE10.1
N$88
  Top 1.016: PMOS10.3 30.04,75.58 | 30.04,75.58 RD10.2 | LED10.A 29.56,75.58 30.04,75.58
N$89
  Top 1.016: RLED10.2 19,79.86 LED10.C
N$90  (via drill 0.6)
  Top 1.016: RLED10.1 23.49,76.53 RD10.1 24.87,76.05 28.68,72.24 v36.3,72.24 | PMOS9.2 36.3,70.38 v36.3,72.24 | v36.3,72.24 42.49,72.24 R_CIN9.1
  Bottom 1.016: v36.3,72.24 34.39,70.33 F9.2
N$93
  Top 1.016: PMOS11.1 40.23,85.3 R_SGATE11.1
N$97
  Top 1.016: PMOS11.3 29.57,83.2 | LED11.A 29.56,83.2 29.57,83.2 | RD11.2 29.57,83.2
N$98
  Top 1.016: RLED11.2 19,87.48 LED11.C
N$99  (via drill 0.6)
  Top 1.016: R_CIN10.1 42.49,79.86 v36.3,79.86 | PMOS10.2 36.3,78 v36.3,79.86 | RLED11.1 23.49,84.15 | 23.49,84.15 RD11.1 | v36.3,79.86 28.68,79.86 24.38,84.15 23.49,84.15
  Bottom 1.016: v36.3,79.86 34.39,77.95 F10.2
N$102
  Top 1.016: PMOS12.1 40.23,93.56 R_SGATE12.1
N$105  (via drill 0.6)
  Top 1.016: PMOS12.2 36.62,95.29 v36.3,95.61 42.62,95.61 R_CIN12.1
  Bottom 1.016: v36.3,95.61 34.52,93.83 F12.2
N$106
  Top 1.016: LED12.A 29.73,91.29 | 29.73,91.29 29.95,91.29 29.95,91.55 RD12.2 | PMOS12.3 29.9,91.46 29.73,91.29
N$107
  Top 1.016: RLED12.2 19,95.73 LED12.C
N$108  (via drill 0.6)
  Top 1.016: v36.3,87.48 42.49,87.48 R_CIN11.1 | 24.23,91.92 RD12.1 23.49,92.41 | 18.67,92.56 RLED12.1 23.49,92.41 | v36.3,87.48 29.31,87.48 24.38,92.41 23.49,92.41 | PMOS11.2 36.3,85.62 v36.3,87.48
  Bottom 1.016: v36.3,87.48 34.39,85.57 F11.2
S1
  Top 0.254: U2.25 65.93,23.87 60.96,18.9 60.96,8.97 58.83,6.83
  Top 0.305: 58.83,6.83 58.52,6.83
  Top 1.016: 58.52,6.83 R_SGATE1.2
S2
  Top 0.254: U2.23 64.93,24.7 59.74,19.51 59.74,15.67 58.52,14.45
  Top 1.016: 58.52,14.45 R_SGATE2.2
S3
  Top 0.254: U2.21 65.43,34.54 64.92,35.05 64.31,35.05 63.4,34.14 63.4,28.04 57.73,22.38 57.73,22.07
  Top 1.016: R_SGATE3.2 57.73,22.07 57.91,22.25
S4
  Top 0.254: U2.19 66.43,35.37 65.53,36.27 63.7,36.27 62.18,34.75 62.18,33.35 58.52,29.69
  Top 0.305: 58.62,29.69 58.52,29.69
  Top 1.016: R_SGATE4.2 58.52,29.69
S5
  Top 0.254: U2.17 67.43,36.2 65.84,37.8 58.83,37.8 58.52,37.49 58.52,37.31
  Top 0.305: 58.9,37.31 58.52,37.31
  Top 1.016: R_SGATE5.2 58.52,37.31
S6
  Top 0.254: U2.15 68.43,37.03 60.53,44.93 58.52,44.93
  Top 1.016: 58.52,44.93 R_SGATE6.2
S7
  Top 0.254: U2.13 69.43,37.86 60.35,46.94 60.35,50.72 58.52,52.55
  Top 1.016: 58.52,52.55 R_SGATE7.2
S8
  Top 0.254: U2.11 70.43,38.69 61.57,47.55 61.57,57.12 58.52,60.17
  Top 1.016: 58.52,60.17 R_SGATE8.2
S9
  Top 0.254: U2.9 71.43,39.52 62.79,48.16 62.79,63.52 58.52,67.79
  Top 1.016: 58.52,67.79 R_SGATE9.2
S10
  Top 0.254: U2.7 72.43,40.35 64.01,48.77 64.01,69.93 58.52,75.41
  Top 1.016: 58.52,75.41 R_SGATE10.2
S11
  Top 0.254: U2.5 73.43,41.17 65.23,49.38 65.23,76.33 58.52,83.03
  Top 1.016: 58.52,83.03 R_SGATE11.2
S12
  Top 0.254: U2.3 74.43,42 66.45,49.99 66.45,84.12 59.28,91.29 R_SGATE12.2
SPI_CHIPSELECT  (via drill 0.6)
  Top 1.016: v89.92,78.94 92.89,75.97 R_A2.2
  Bottom 1.016: SPI.3 89.92,82.12 v89.92,78.94
SPI_CLOCK  (via drill 0.6)
  Top 1.016: R_A1.2 95.78,76.73 v94.18,78.33
  Bottom 1.016: v94.18,78.33 92.43,80.09 SPI.2
SPI_MASTERIN  (via drill 0.6)
  Top 1.016: v85.04,78.94 87,76.99 R_A4.2
  Bottom 1.016: SPI.5 84.81,79.17 v85.04,78.94
SPI_MASTEROUT  (via drill 0.6)
  Top 1.016: R_A3.2 90.09,75.11 v89.92,75.29
  Bottom 1.016: v89.92,75.29 87.35,77.85 SPI.4
V+_LTC  (via drill 0.6)
  Top 0.254: 69.06,56.57 v69.19,56.69
  Top 1.016: v69.19,56.69 69.19,54.43 R_V+.2
  Bottom 1.016: 64.31,94.38 V+_LTC.2 64.54,92.05 | D1_V+.C 68.02,91.95 70.28,91.95 C_V+LTC.1 73.01,94.68 SCHOTTKY_V+.C | 64.54,92.05 D1_V+.C | D2_V+.C 61.86,90.26 D1_V+.C | v69.19,56.69 64.54,61.34 64.54,92.05
VREF  (via drill 0.6)
  Top 0.254: R_VTEMP2.2 74.17,12.9 75.89,14.63 75.89,15.85 v71.02,20.73 68.93,22.82 U2.31
  Top 0.305: R_VTEMP2.2 73.08,13.29 73.86,12.5 74.07,12.5 | 68.55,12.9 R_VTEMP1.2
  Top 1.016: R_VTEMP1.2 73,12.98 R_VTEMP2.2
  Bottom 1.016: C_VREF.1 70.13,21.61 v71.02,20.73
VREG
  Top 0.254: R_WDTB.1 78.99,13.97 69.43,23.53 U2.32
  Top 0.508: U1.10 80.29,43.59 80.16,43.59 R_VDD_VREG.1 78.97,42.4 | U1.16 87.91,42.44 R_B1..2 | 88.39,52.73 93.27,52.73 97.77,48.23 97.77,30.84 R_GPIO2.2 | C_COUPLINGB.1 72.57,56.05 75.89,52.73 80.47,52.73 | 80.47,52.73 85.95,52.73 | 80.29,47.68 80.29,52.55 80.47,52.73
  Top 0.61: U1.10 80.29,47.68 | 85.34,52.73 85.95,52.73 88.39,52.73
  Top 1.016: C_COUPLINGB.1 72.44,66.55 C_VREG.1 72.44,70.24 LED_VDDHV.A | R_WDTB.1 82.68,10.97 92.35,10.97 95.1,13.72 95.1,20.7 R_GPIO1.2 R_GPIO2.2 93.06,26.72 88.7,31.09 88.7,31.67 R_B4..2 R_B3..2 88.65,35.05 R_B2..2 88.6,38.28 R_B1..2
(copper drawn outside any net)
  shapes: Top area x2

## Text on the board
tPlace: C12+ | ISO+ | ISO+ | GND- | CELL 12+ | CLK | 5V | CS | GND | M.IN | M.OUT | CELL 6+ | CELL 5+ | VREG | GPIO2 | GND | VREG | GPIO1 | GND | CELL 1- | ANARGYA @2022 | D | G | D | G